# Altium PCB PCB1.PcbDoc
Units mil, origin at the board's own origin, x right, y up, seen from the top; angles counter-clockwise.
Board outline 2585 x 4010 mil, 2 copper layers (Top Layer, Bottom Layer); 69 components, 50 nets, 301 pads, 131 vias.
Unrouted connection lines stored in the file: 15.
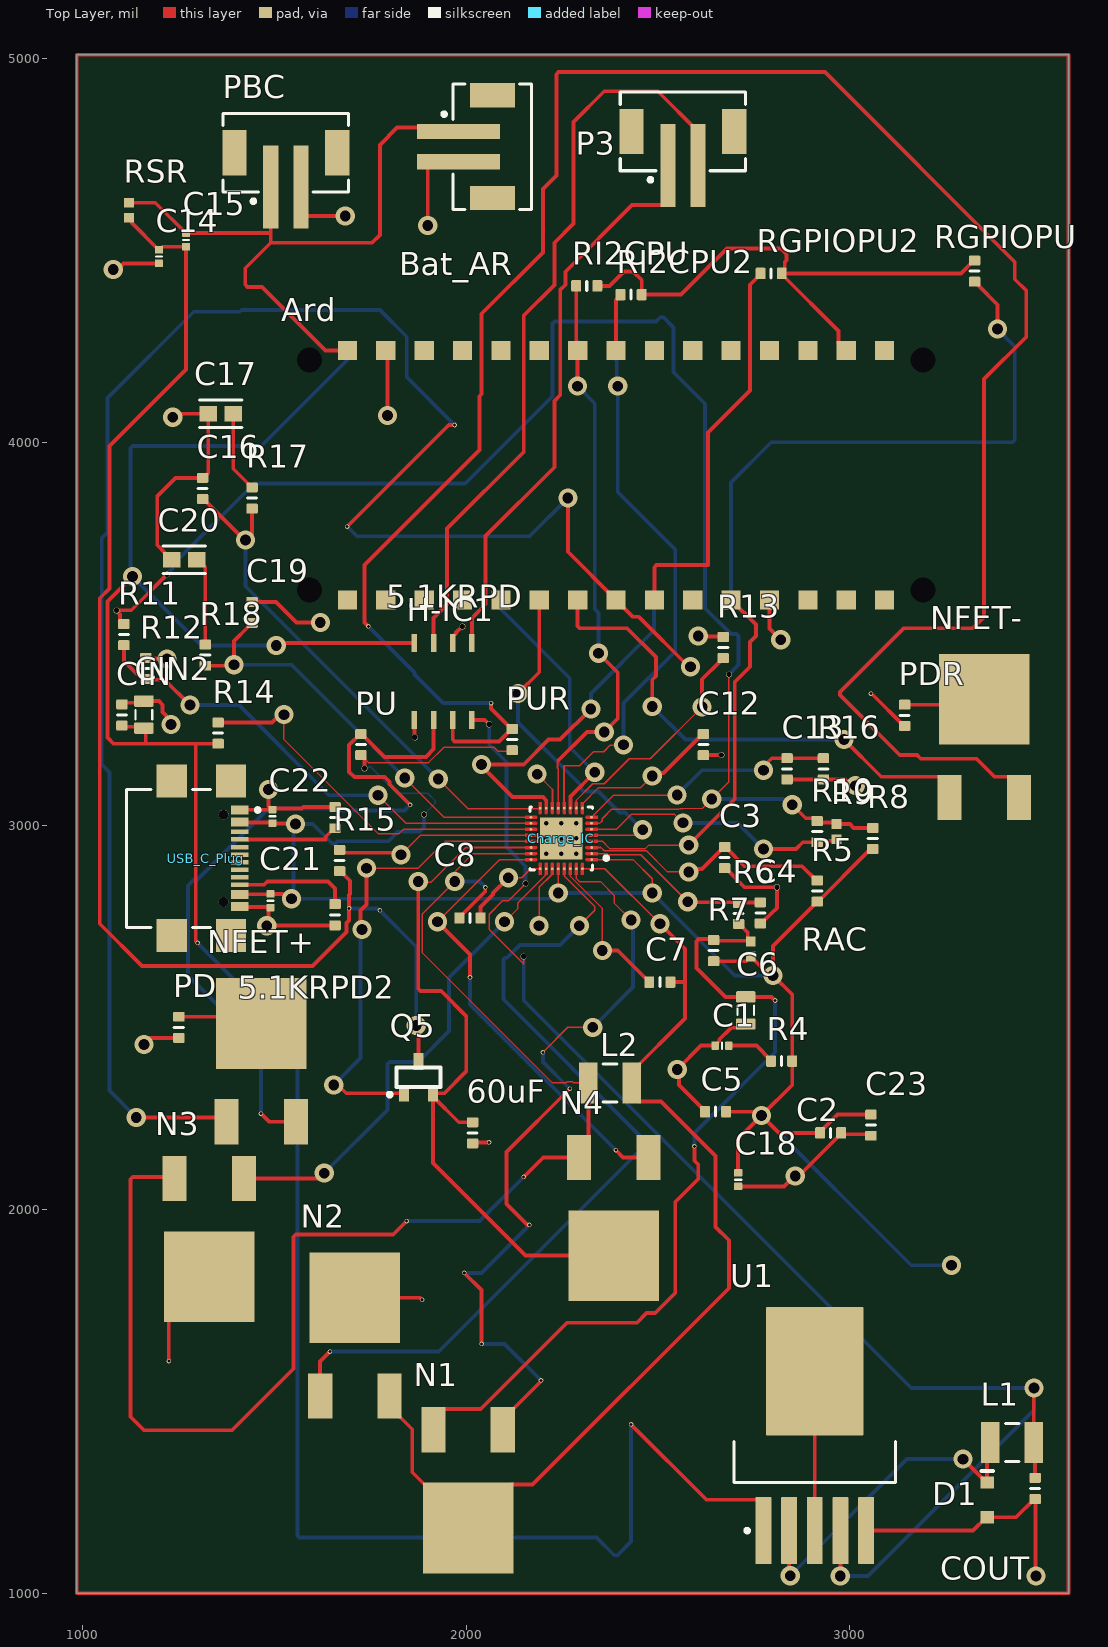
[diagram p0: Top Layer view]
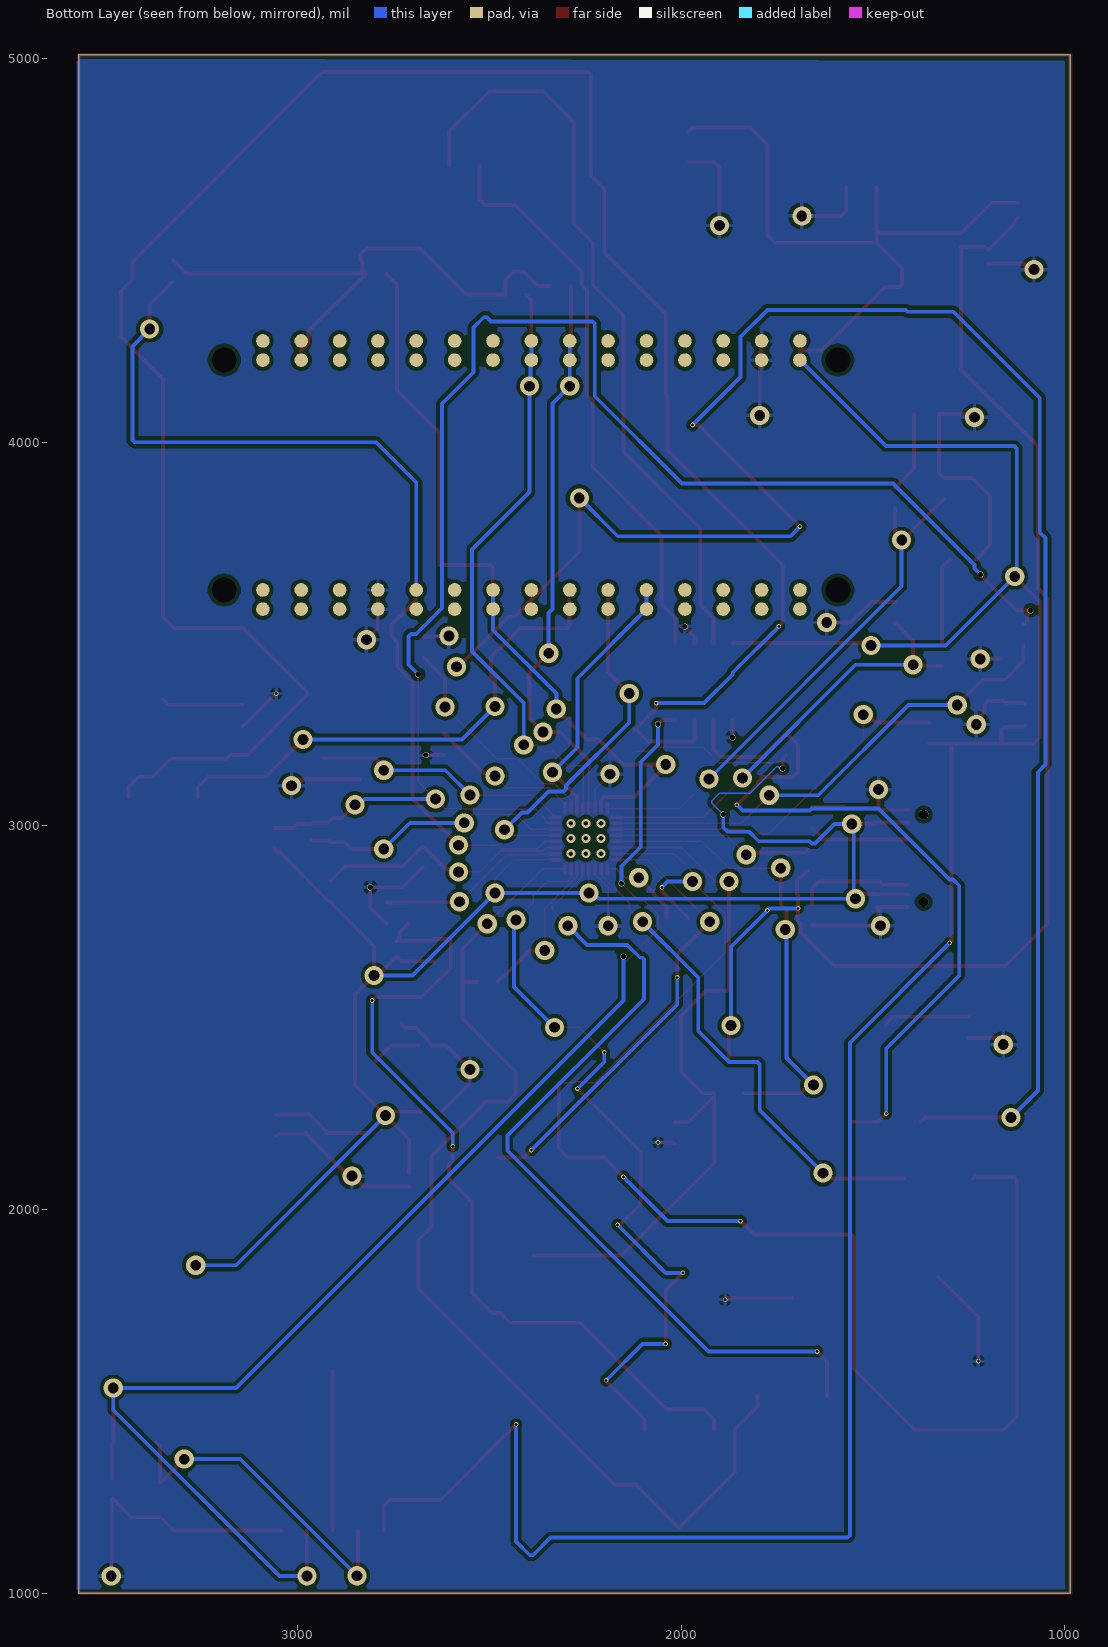
[diagram p1: Bottom Layer view, seen from below]
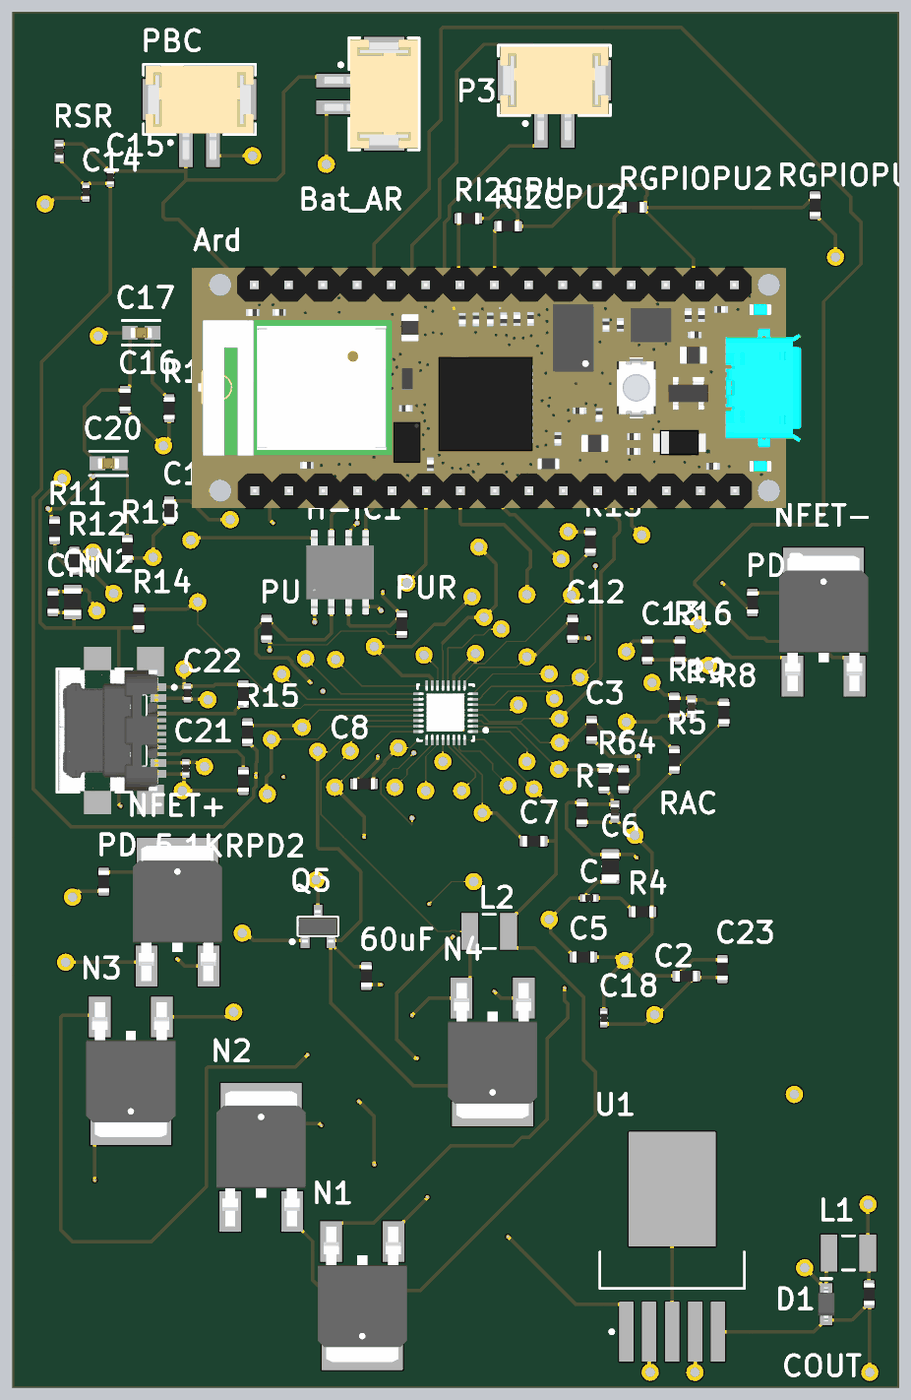
[diagram p2: 3D render of the assembled board from above, using the file's embedded part models]

## Layer stack, top to bottom
Top Solder: solder mask 0.4, Solder Resist, Dk 3.5
Top Layer: signal copper 1.4
Dielectric 1: dielectric 12.6, FR-4, Dk 4.8
Bottom Layer: signal copper 1.4
Bottom Solder: solder mask 0.4, Solder Resist, Dk 3.5

## Board outline
985,1000 985,5010 3570,5010 3570,1000

## Design rules (kind name [scope] priority, off if disabled: settings)
Clearance [All] p1: gap=10 ignorepadtopadclearanceinfootprint=FALSE
PolygonConnect [All] p1: connectstyle=Relief reliefconductorwidth=10 reliefentries=4 polygonreliefangle="90 Angle" airgapwidth=10
RoutingVias [All] p1: holewidth=28 width=50 viastyle="Through Hole" minholewidth=28 minwidth=50 maxholewidth=28 maxwidth=50
SolderMaskExpansion [All] p1: expansion=4 istentingtop=FALSE
SupplyNets "Schematic Supply Nets_1" [InNet('BAT-')] p1: voltage=0.000
SupplyNets "Schematic Supply Nets_3" [InNet('REGN')] p2: voltage=0.000
Width [All] p1: maxlimit=10 minlimit=10 preferedwidth=10
30 further rules are at their usual default settings.

## Components (designator, comment, footprint, x,y, rotation, side; value= is the part's Value field where it differs from the comment)
5.1KRPD "5K1 0.1 0603" RESC0603(1608)_L 1658.23,3021.47 r90 top value=5.1k
5.1KRPD2 "5K1 0.1 0603" RESC0603(1608)_L 1658.23,2768.43 r270 top value=5.1k
60uF "0603-CAP" RESC0603(1608)_L 2016.71,2200 r90 top value=60uF
Ard "ARDUNIO_33_NANO_IOT" Arduino33NanoIOT 3240.59,4264.07 r180 top
Bat_AR "2-Pin" 620302124022 2068.38,4770.5 r90 top
C1 "Capacitor 1u" RESC0402(1005)_L 2666.68,2427.29 r0 top value=1µF
C2 "0603-CAP" RESC0603(1608)_L 2950,2200 r180 top value=40uF
C3 "Capacitor 33n" RESC0603(1608)_L 2673.63,2917.54 r90 top value=33nF
C4 "Capacitor 33n" RESC0603(1608)_L 2766.75,2773.41 r90 top value=33nF
C5 "Capacitor 470n" RESC0603(1608)_L 2650.01,2255.14 r0 top value=470nF
C6 "Capacitor 10u" RESC0805(2012)_L 2728.78,2519.14 r90 top value=10µF
C7 "Capacitor 47n" RESC0603(1608)_L 2504.74,2593.01 r0 top value=47nF
C8 "Capacitor 47n" RESC0603(1608)_L 2010,2760 r180 top value=47nF
C12 "Capacitor 100p" RESC0603(1608)_L 2618.28,3211.89 r90 top value=100pF
C13 "Capacitor 100p" RESC0603(1608)_L 2836.31,3148.88 r90 top value=100pF
C14 "Capacitor 1u" RESC0402(1005)_L 1199.24,4484 r90 top value=1µF
C15 "Capacitor 1u" RESC0402(1005)_L 1270,4527.28 r90 top value=1µF
C16 "Capacitor 33p" RESC0603(1608)_L 1313.07,3879.54 r270 top value=33pF
C17 "1800pf" FP-GRM188-0_1-e0_2_0_5-IPC_A 1360.39,4074.32 r0 top
C18 "Capacitor 1u" RESC0402(1005)_L 2708.91,2078.06 r90 top value=1µF
C19 "Capacitor 33p" RESC0603(1608)_L 1441.89,3556.5 r270 top value=33pF
C20 "1800pf" FP-GRM188-0_1-e0_2_0_5-IPC_A 1265.12,3693.86 r0 top
C21 "Capacitor 1u" RESC0402(1005)_L 1490,2805 r90 top value=1µF
C22 "Capacitor 1u" RESC0402(1005)_L 1495,3025 r270 top value=1µF
C23 "Capacitor 3u3" RESC0603(1608)_L 3055,2220 r90 top value=3.3µF
Charge_IC "BQ25703ARSNT" FP-RSN0032B-MFG 2247.96,2967.34 r180 top
CIN "0603-CAP" RESC0603(1608)_L 1102.83,3289.23 r270 top value=470u
CIN2 "Capacitor 10u" RESC0805(2012)_L 1160,3290 r270 top value=10µF
COUT "0603-CAP" RESC0603(1608)_L 3482.91,1273.07 r90 top value=470u
D1 "DIODE_SCHOTTKY_SOD-323" SOD-323 3357.91,1243.35 r270 top
H-IC1 "DriveMotorControl" TB67H451FNG,EL 1865.11,3276.5 r0 top
L1 "22uH" INDC3225X24N 3422.91,1393.07 r0 top
L2 "IND_1210" INDC3225X24N 2375,2330 r180 top value=2.2uH
N1 "Q1" DPAK(2-7K1S) 2005,1288.11 r180 top
N2 "Q2" DPAK(2-7K1S) 1710,1651.89 r0 top
N3 "Q3" DPAK(2-7K1S) 1330,1943.11 r180 top
N4 "Q4" DPAK(2-7K1S) 2385,1998.11 r180 top
NFET+ "M2" DPAK(2-7K1S) 1465.88,2366.94 r0 top
NFET- "M1" DPAK(2-7K1S) 3350,3211.89 r0 top
P3 "620302124022" 620302124022 2565,4810 r180 top
PBC "620302124022" 620302124022 1530.03,4754.32 r180 top
PD "10K 0.1 0603" RESC0603(1608)_L 1250.88,2475.05 r90 top value=10k
PDR "10K 0.1 0603" RESC0603(1608)_L 3143.01,3288.29 r90 top value=10k
PU "10K 0.1 0603" RESC0603(1608)_L 1725.76,3211.89 r270 top value=10k
PUR "10K 0.1 0603" RESC0603(1608)_L 2120,3225 r270 top value=10k
Q5 "DMP3056L-7" SOT96P240X110-3N/SOT23-3 1875.75,2344.69 r90 top
R4 "2R2 5 0603" RESC0603(1608)_L 2822.18,2387.07 r0 top value=2.2
R5 "5R1 5 0603" RESC0603(1608)_L 2915,2830 r270 top value=5.1
R6 "5R1 5 0603" RESC0603(1608)_L 2709.84,2772.02 r270 top value=5.1
R7 "1K 0.1 0603" RESC0603(1608)_L 2645,2675 r270 top value=1k
R8 "10R 0.1 0603" RESC0603(1608)_L 3059.82,2967.34 r90 top value=10
R9 "Resistor 0R +/- 5% 0402 100 mW" RESC1005X40X25ML05T05 2965,2985 r90 top value=0
R10 "1R 5 0603" RESC0603(1608)_L 2915,2985 r270 top value=1
R11 "300K 0.1 0603" RESC0603(1608)_L 1107.8,3498.56 r90 top value=300k
R12 "200K 0.1 0603" RESC0603(1608)_L 1165,3410 r270 top value=200k
R13 "30K 0.1 0603" RESC0603(1608)_L 2670,3465 r270 top value=30k
R14 "10R 0.1 0603" RESC0603(1608)_L 1353.4,3241.77 r90 top value=10
R15 "10R 0.1 0603" RESC0603(1608)_L 1670,2910 r90 top value=10
R16 "130K 0.1 0603" RESC0603(1608)_L 2931.31,3148.88 r90 top value=130k
R17 "2R2 5 0603" RESC0603(1608)_L 1441.89,3854.49 r90 top value=2.2
R18 "2R2 5 0603" RESC0603(1608)_L 1320,3445 r90 top value=2.2
RAC "Resistor 0R +/- 5% 0402 100 mW" RESC1005X40X25ML05T05 2741.58,2679.45 r90 top value=0
RGPIOPU "10K 0.1 0603" RESC0603(1608)_L 3325.04,4446.01 r270 top value=10k
RGPIOPU2 "10K 0.1 0603" RESC0603(1608)_L 2795,4440 r180 top value=10k
RI2CPU "10K 0.1 0603" RESC0603(1608)_L 2314.3,4407.59 r180 top value=10k
RI2CPU2 "10K 0.1 0603" RESC0603(1608)_L 2430,4385 r180 top value=10k
RSR "Resistor 0R +/- 5% 0402 100 mW" RESC1005X40X25ML05T05 1121.03,4604.67 r90 top value=0
U1 "LM2596S-5.0/NOPB" KTT0005B_M 2908.65,1411.31 r90 top
USB_C_Plug "USB4110-GF-A" FP-USB4110-GF-A-MFG 1265.12,2915.47 r270 top

## Footprints (in the part's own frame and the unit in brackets; to place one, negate y for a bottom-side part, rotate by r counter-clockwise, add the part's x,y. Pads: shape width x height; smd on the part's side, far side on the other; paste and mask are expansions set on the pad)
620302124022 [mm] "2.00mm SMT Male Vertical Shrouded Header, 2p"
  rect 1x5.5 smd: 1(1,2.25) 2(-1,2.25)
  rect 1.6x3 smd: MP1(-3.4,0) MP2(3.4,0)
  silkscreen extent -4.15,-2.6 4.15,3.32, body extent -4,-2.5 4,4.51, height 6.77
Arduino33NanoIOT [mm]
  rect 1.27x1.27 smd: 1(3.81,0.635) 2(6.35,0.635) 3(8.89,0.635) 4(11.43,0.635) 5(13.97,0.635) 6(16.51,0.635) 7(19.05,0.635) 8(21.59,0.635) 9(24.13,0.635) 10(26.67,0.635) 11(29.21,0.635) 12(31.75,0.635) 13(34.29,0.635) 14(36.83,0.635) 15(39.37,0.635) 16(3.81,17.145) 17(6.35,17.145) 18(8.89,17.145) 19(11.43,17.145) 20(13.97,17.145) 21(16.51,17.145) 22(19.05,17.145) 23(21.59,17.145) 24(24.13,17.145) 25(26.67,17.145) 26(29.21,17.145) 27(31.75,17.145) 28(34.29,17.145) 29(36.83,17.145) 30(39.37,17.145)
  round 0.9 smd far side: 1(3.825,0) 1(3.825,1.27) 2(6.365,0) 2(6.365,1.27) 3(8.905,0) 3(8.905,1.27) 4(11.445,0) 4(11.445,1.27) 5(13.985,0) 5(13.985,1.27) 6(16.525,0) 6(16.525,1.27) 7(19.065,0) 7(19.065,1.27) 8(21.605,0) 8(21.605,1.27) 9(24.145,0) 9(24.145,1.27) 10(26.685,0) 10(26.685,1.27) 11(29.225,0) 11(29.225,1.27) 12(31.765,0) 12(31.765,1.27) 13(34.305,0) 13(34.305,1.27) 14(36.845,0) 14(36.845,1.27) 15(39.385,0) 15(39.385,1.27) 16(3.825,16.486) 16(3.825,17.756) 17(6.365,16.486) 17(6.365,17.756) 18(8.905,17.756) 18(8.905,16.486) 19(11.445,17.756) 19(11.445,16.486) 20(13.985,16.486) 20(13.985,17.756) 21(16.525,16.486) 21(16.525,17.756) 22(19.065,16.486) 22(19.065,17.756) 23(21.605,16.486) 23(21.605,17.756) 24(24.145,16.486) 24(24.145,17.756) 25(26.685,16.486) 25(26.685,17.756) 26(29.225,16.486) 26(29.225,17.756) 27(31.765,16.486) 27(31.765,17.756) 28(34.305,16.486) 28(34.305,17.756) 29(36.845,16.486) 29(36.845,17.756) 30(39.385,16.486) 30(39.385,17.756)
  round 0 hole 1.65: 12(1.27,16.5) 12(1.27,1.27) 12(41.89,1.27) 12(41.89,16.5)
  body extent -1.13,0 44,17.78, height 9.36
DPAK(2-7K1S) [mm]
  rect 1.6x3 smd: 1(-2.3,-3.5) 3(2.3,-3.5)
  rect 6x6 smd: 2(0,3)
  body extent -3.3,-4.6 3.3,5.4, height 2.27
FP-GRM188-0_1-e0_2_0_5-IPC_A [mil]
  rect 45.62x39.85 smd paste+0 mask+0: 1(-32.55,0) 2(32.55,0)
  silkscreen extent -55,-36 55,36, body extent -75,-40 75,40, height 10
FP-RSN0032B-MFG [mm]
  round 0.18 smd paste+0 mask+0: 1(-2.01,1.4) 2(-2.01,1) 3(-2.01,0.6) 4(-2.01,0.2) 5(-2,-0.2) 6(-2,-0.6) 7(-2,-1) 8(-2,-1.4) 9(-1.4,-2.01) 10(-1,-2.01) 11(-0.6,-2.01) 12(-0.2,-2.01) 13(0.2,-2) 14(0.6,-2) 15(1,-2) 16(1.4,-2) 17(2.01,-1.4) 18(2.01,-1) 19(2.01,-0.6) 20(2.01,-0.2) 21(2,0.2) 22(2,0.6) 23(2,1) 24(2,1.4) 25(1.4,2.01) 26(1,2.01) 27(0.6,2.01) 28(0.2,2.01) 29(-0.2,2) 30(-0.6,2) 31(-1,2) 32(-1.4,2)
  rect 2.8x2.8 smd paste-1000 mask+0: 33(0,0)
  Top Layer region: -2.4,1.5 -1.7,1.5 -1.662,1.492 -1.629,1.471 -1.608,1.438 -1.6,1.4 -1.6,1.4 -1.608,1.362 -1.629,1.329 -1.662,1.308 -1.7,1.3 -1.7,1.3 -2.4,1.3
  Top Layer region: -2.4,1.1 -1.7,1.1 -1.662,1.092 -1.629,1.071 -1.608,1.038 -1.6,1 -1.6,1 -1.608,0.962 -1.629,0.929 -1.662,0.908 -1.7,0.9 -1.7,0.9 -2.4,0.9
  Top Layer region: -2.4,0.7 -1.7,0.7 -1.662,0.692 -1.629,0.671 -1.608,0.638 -1.6,0.6 -1.6,0.6 -1.608,0.562 -1.629,0.529 -1.662,0.508 -1.7,0.5 -1.7,0.5 -2.4,0.5
  Top Layer region: -2.4,0.3 -1.7,0.3 -1.662,0.292 -1.629,0.271 -1.608,0.238 -1.6,0.2 -1.6,0.2 -1.608,0.162 -1.629,0.129 -1.662,0.108 -1.7,0.1 -1.7,0.1 -2.4,0.1
  Top Layer region: -2.4,-0.1 -1.7,-0.1 -1.662,-0.108 -1.629,-0.129 -1.608,-0.162 -1.6,-0.2 -1.6,-0.2 -1.608,-0.238 -1.629,-0.271 -1.662,-0.292 -1.7,-0.3 -1.7,-0.3 -2.4,-0.3
  Top Layer region: -2.4,-0.5 -1.7,-0.5 -1.662,-0.508 -1.629,-0.529 -1.608,-0.562 -1.6,-0.6 -1.6,-0.6 -1.608,-0.638 -1.629,-0.671 -1.662,-0.692 -1.7,-0.7 -1.7,-0.7 -2.4,-0.7
  Top Layer region: -2.4,-0.9 -1.7,-0.9 -1.662,-0.908 -1.629,-0.929 -1.608,-0.962 -1.6,-1 -1.6,-1 -1.608,-1.038 -1.629,-1.071 -1.662,-1.092 -1.7,-1.1 -1.7,-1.1 -2.4,-1.1
  Top Layer region: -2.4,-1.3 -1.7,-1.3 -1.662,-1.308 -1.629,-1.329 -1.608,-1.362 -1.6,-1.4 -1.6,-1.4 -1.613,-1.45 -1.65,-1.487 -1.7,-1.5 -1.7,-1.5 -2.4,-1.5
  Top Layer region: 2.4,-1.5 1.7,-1.5 1.662,-1.492 1.629,-1.471 1.608,-1.438 1.6,-1.4 1.6,-1.4 1.608,-1.362 1.629,-1.329 1.662,-1.308 1.7,-1.3 1.7,-1.3 2.4,-1.3
  Top Layer region: 2.4,-1.1 1.7,-1.1 1.662,-1.092 1.629,-1.071 1.608,-1.038 1.6,-1 1.6,-1 1.608,-0.962 1.629,-0.929 1.662,-0.908 1.7,-0.9 1.7,-0.9 2.4,-0.9
  Top Layer region: 2.4,-0.7 1.7,-0.7 1.662,-0.692 1.629,-0.671 1.608,-0.638 1.6,-0.6 1.6,-0.6 1.608,-0.562 1.629,-0.529 1.662,-0.508 1.7,-0.5 1.7,-0.5 2.4,-0.5
  Top Layer region: 2.4,-0.3 1.7,-0.3 1.662,-0.292 1.629,-0.271 1.608,-0.238 1.6,-0.2 1.6,-0.2 1.608,-0.162 1.629,-0.129 1.662,-0.108 1.7,-0.1 1.7,-0.1 2.4,-0.1
  Top Layer region: 2.4,0.1 1.7,0.1 1.662,0.108 1.629,0.129 1.608,0.162 1.6,0.2 1.6,0.2 1.608,0.238 1.629,0.271 1.662,0.292 1.7,0.3 1.7,0.3 2.4,0.3
  Top Layer region: 2.4,0.5 1.7,0.5 1.662,0.508 1.629,0.529 1.608,0.562 1.6,0.6 1.6,0.6 1.608,0.638 1.629,0.671 1.662,0.692 1.7,0.7 1.7,0.7 2.4,0.7
  Top Layer region: 2.4,0.9 1.7,0.9 1.662,0.908 1.629,0.929 1.608,0.962 1.6,1 1.6,1 1.608,1.038 1.629,1.071 1.662,1.092 1.7,1.1 1.7,1.1 2.4,1.1
  Top Layer region: 2.4,1.3 1.7,1.3 1.662,1.308 1.629,1.329 1.608,1.362 1.6,1.4 1.6,1.4 1.608,1.438 1.629,1.471 1.662,1.492 1.7,1.5 1.7,1.5 2.4,1.5
  Top Layer region: -1.5,-2.4 -1.5,-1.7 -1.492,-1.662 -1.471,-1.629 -1.438,-1.608 -1.4,-1.6 -1.4,-1.6 -1.362,-1.608 -1.329,-1.629 -1.308,-1.662 -1.3,-1.7 -1.3,-1.7 -1.3,-2.4
  Top Layer region: -1.1,-2.4 -1.1,-1.7 -1.092,-1.662 -1.071,-1.629 -1.038,-1.608 -1,-1.6 -1,-1.6 -0.962,-1.608 -0.929,-1.629 -0.908,-1.662 -0.9,-1.7 -0.9,-1.7 -0.9,-2.4
  Top Layer region: -0.7,-2.4 -0.7,-1.7 -0.692,-1.662 -0.671,-1.629 -0.638,-1.608 -0.6,-1.6 -0.6,-1.6 -0.562,-1.608 -0.529,-1.629 -0.508,-1.662 -0.5,-1.7 -0.5,-1.7 -0.5,-2.4
  Top Layer region: -0.3,-2.4 -0.3,-1.7 -0.292,-1.662 -0.271,-1.629 -0.238,-1.608 -0.2,-1.6 -0.2,-1.6 -0.162,-1.608 -0.129,-1.629 -0.108,-1.662 -0.1,-1.7 -0.1,-1.7 -0.1,-2.4
  Top Layer region: 0.1,-2.4 0.1,-1.7 0.108,-1.662 0.129,-1.629 0.162,-1.608 0.2,-1.6 0.2,-1.6 0.238,-1.608 0.271,-1.629 0.292,-1.662 0.3,-1.7 0.3,-1.7 0.3,-2.4
  Top Layer region: 0.5,-2.4 0.5,-1.7 0.508,-1.662 0.529,-1.629 0.562,-1.608 0.6,-1.6 0.6,-1.6 0.638,-1.608 0.671,-1.629 0.692,-1.662 0.7,-1.7 0.7,-1.7 0.7,-2.4
  Top Layer region: 0.9,-2.4 0.9,-1.7 0.908,-1.662 0.929,-1.629 0.962,-1.608 1,-1.6 1,-1.6 1.038,-1.608 1.071,-1.629 1.092,-1.662 1.1,-1.7 1.1,-1.7 1.1,-2.4
  Top Layer region: 1.3,-2.4 1.3,-1.7 1.308,-1.662 1.329,-1.629 1.362,-1.608 1.4,-1.6 1.4,-1.6 1.438,-1.608 1.471,-1.629 1.492,-1.662 1.5,-1.7 1.5,-1.7 1.5,-2.4
  Top Layer region: 1.5,2.4 1.5,1.7 1.492,1.662 1.471,1.629 1.438,1.608 1.4,1.6 1.4,1.6 1.362,1.608 1.329,1.629 1.308,1.662 1.3,1.7 1.3,1.7 1.3,2.4
  Top Layer region: 1.1,2.4 1.1,1.7 1.092,1.662 1.071,1.629 1.038,1.608 1,1.6 1,1.6 0.962,1.608 0.929,1.629 0.908,1.662 0.9,1.7 0.9,1.7 0.9,2.4
  Top Layer region: 0.7,2.4 0.7,1.7 0.687,1.65 0.65,1.613 0.6,1.6 0.6,1.6 0.562,1.608 0.529,1.629 0.508,1.662 0.5,1.7 0.5,1.7 0.5,2.4
  Top Layer region: 0.3,2.4 0.3,1.7 0.292,1.662 0.271,1.629 0.238,1.608 0.2,1.6 0.2,1.6 0.162,1.608 0.129,1.629 0.108,1.662 0.1,1.7 0.1,1.7 0.1,2.4
  Top Layer region: -0.1,2.4 -0.1,1.7 -0.108,1.662 -0.129,1.629 -0.162,1.608 -0.2,1.6 -0.2,1.6 -0.238,1.608 -0.271,1.629 -0.292,1.662 -0.3,1.7 -0.3,1.7 -0.3,2.4
  Top Layer region: -0.5,2.4 -0.5,1.7 -0.508,1.662 -0.529,1.629 -0.562,1.608 -0.6,1.6 -0.6,1.6 -0.638,1.608 -0.671,1.629 -0.692,1.662 -0.7,1.7 -0.7,1.7 -0.7,2.4
  Top Layer region: -0.9,2.4 -0.9,1.7 -0.908,1.662 -0.929,1.629 -0.962,1.608 -1,1.6 -1,1.6 -1.038,1.608 -1.071,1.629 -1.092,1.662 -1.1,1.7 -1.1,1.7 -1.1,2.4
  Top Layer region: -1.3,2.4 -1.3,1.7 -1.313,1.65 -1.35,1.613 -1.4,1.6 -1.4,1.6 -1.438,1.608 -1.471,1.629 -1.492,1.662 -1.5,1.7 -1.5,1.7 -1.5,2.4
  silkscreen extent -3.1,-2.07 2.07,2.07, body extent -2.5,-2.5 2.5,2.5, height 0.25
FP-USB4110-GF-A-MFG [mm]
  rect 2.18x2 smd paste+0 mask+0: 1(-5.11,3.105) 2(5.11,3.105) 3(-5.11,-0.825) 4(5.11,-0.825)
  rect 0.6x1.15 smd paste+0 mask+0: A1-B12(-3.2,3.68) A4-B9(-2.4,3.68) B1-A12(3.2,3.68) B4-A9(2.4,3.68)
  rect 0.3x1.15 smd paste+0 mask+0: A5(-1.25,3.68) A6(-0.25,3.68) A7(0.25,3.68) A8(1.25,3.68) B5(1.75,3.68) B6(0.75,3.68) B7(-0.75,3.68) B8(-1.75,3.68)
  round 0.65 hole 0.65 unplated paste-2539.97 mask+0: ""(-2.89,2.605) ""(2.89,2.605)
  silkscreen extent -4.57,-3.83 4.57,4.99, body extent -6.3,-3.92 6.3,4.36, height 0.25
INDC3225X24N [mm] "Chip Inductor, 2-Leads, Body 3.20x2.50mm, IPC Medium Density"
  rect 1.23x2.72 smd: 1(-1.435,0) 2(1.435,0)
  silkscreen extent -0.45,-1.26 0.45,1.26, body extent -1.7,-1.35 1.7,1.35, height 2.4
KTT0005B_M [mm] "DPAK, 5-Leads, Body 10.65x9.65mm, Pitch 1.7mm, IPC Low Density"
  rrect10% 4.45x1.05 smd: 1(-6.3,3.4) 2(-6.3,1.7) 3(-6.3,0) 4(-6.3,-1.7) 5(-6.3,-3.4)
  rrect2% 8.5x6.45 smd: 6(4.25,0)
  silkscreen extent -6.42,-5.35 -0.4,5.35, body extent -3.1,-5.32 6.55,5.33, height 4.83
RESC0402(1005)_L [mm] "Chip Resistor, Body 1.0x0.5mm, IPC High Density"
  rrect25% 0.5x0.55 smd: 1(-0.45,0) 2(0.45,0)
  silkscreen extent 0,-0.2 0,0.2, body extent -0.5,-0.25 0.5,0.25, height 0.3
RESC0603(1608)_L [mm] "Chip Resistor, Body 1.6x0.8mm, IPC High Density"
  rrect25% 0.66x0.76 smd: 1(-0.7,0) 2(0.7,0)
  silkscreen extent 0,-0.3 0,0.3, body extent -0.8,-0.4 0.8,0.4, height 0.45
RESC0805(2012)_L [mm] "Chip Resistor, Body 2.0x1.3mm, IPC High Density"
  rrect25% 0.76x1.3 smd: 1(-0.9,0) 2(0.89,0)
  silkscreen extent -0.3,-0.55 0.3,0.55, body extent -1,-0.62 1,0.63, height 0.6
RESC1005X40X25ML05T05 [mm] "Chip Resistor, 2-Leads, Body 1.05x0.55mm, IPC Low Density"
  rect 0.65x0.65 smd: 1(-0.5,0) 2(0.5,0)
  body extent -0.53,-0.28 0.53,0.28, height 0.4
SOD-323 [mil]
  rect 31.5x35.43 smd: 1(-45.28,0) 2(45.28,0)
  silkscreen extent -75,-15 -75,15, body extent -49,-25 49,25, height 43
SOT96P240X110-3N/SOT23-3 [mm]
  rect 1.1x0.65 smd: 1(-1.05,0.96) 2(-1.05,-0.96) 3(1.05,0)
  silkscreen extent -1.27,-1.45 0.65,2.03, body extent -1.2,-1.45 1.2,1.45, height 1.1
TB67H451FNG,EL [mm]
  rect 0.36x1.195 smd: 1(0,0) 2(1.27,0) 3(2.54,0) 4(3.81,0) 5(3.81,5.08) 6(2.54,5.08) 7(1.27,5.08) 8(0,5.08)
  round 0.3 on Top Overlay: ""(-0.254,1.143)
  body extent -0.6,-0.56 4.41,5.64, height 1.7

## Part data
5.1KRPD 5.1KRPD2: library part CMP-009-01454-3, "0603 (1608 Metric) 1/10 W 5K1 1 Precision Thick Film Chip Resistor", Case-EIA=0603, Power=100mW, Tolerance=0.1%
60uF C2 CIN COUT: library part CMP-001-00083-4, "Imperial 0603 Capacitor", Case/Package=0603
Ard: "Arduino Nano IC for I2C Comms/Control"
Bat_AR P3 PBC: library part CMP-1502-00660-2, Color="Beige, White", Contact Resistance=20mΩ, Current Rating=2A, Flammability Rating="UL94 V-0", Insulation Resistance=1GΩ, Max Operating Temperature=85°C, Min Operating Temperature=-40°C, Operating Supply Voltage=100V, Voltage Rating=125V, Connector Type="Male Pin", Contact Gender=Male, Contact Material=Copper, Contact Mating Length=3.5052mm, Contact Plating=Tin, Gender=Male, Height=6.6mm, Housing Material=Nylon, Insulation=Insulated, Lead Pitch=2mm, Length=5mm, Mount="Surface Mount", NexarPartId=18818242, Number of Contacts=2, Number of Pins=2, Number of Positions=2, Number of Rows=1, Orientation=Vertical, Packaging="Tape and Reel", Pitch=2mm, REACH SVHC=Unknown, RoHS=Compliant, Termination=SMD/SMT, Width=7.9mm
C1 C14 C15 C18 C21 C22: library part CMP-001-00736-2, "Chip Capacitor, 1u 25V 0402 X7R", Capacitor Type=X7R, Case/Package=0402, Voltage Rating=25V
C3 C4: library part CMP-001-00783-2, "Chip Capacitor, 33n 10V 0603 X7R", Capacitor Type=X7R, Case/Package=0603, Voltage Rating=10V
C5: library part CMP-001-00951-2, "Chip Capacitor, 470n 50V 0603 X7R", Capacitor Type=X7R, Case/Package=0603, Voltage Rating=50V
C6: library part CMP-001-00968-2, "Chip Capacitor, 10u 25V 0805 X7R", Capacitor Type=X7R, Case/Package=0805, Voltage Rating=25V
C7 C8: library part CMP-001-00939-2, "Chip Capacitor, 47n 50V 0603 X7R", Capacitor Type=X7R, Case/Package=0603, Voltage Rating=50V
C12 C13: library part CMP-001-00907-2, "Chip Capacitor, 100p 50V 0603 X7R", Capacitor Type=X7R, Case/Package=0603, Voltage Rating=50V
C16 C19: library part CMP-001-00901-2, "Chip Capacitor, 33p 50V 0603 X7R", Capacitor Type=X7R, Case/Package=0603, Voltage Rating=50V
C17 C20: library part CMP-2006-02619-2, "Chip Multilayer Ceramic Capacitors for General Purpose, 0603, 1800pF, C0G, 30ppm/°C, 5%, 50V", Capacitance=1.8nF, Case Code (Imperial)=0603, Case Code (Metric)=1608, Dielectric=C0G, Max Operating Temperature=125°C, Min Operating Temperature=-55°C, Package Quantity=1, Temperature Coefficient=30ppm/°C, Tolerance=5%, Voltage=50V, Case/Package=0603, Depth=0.8mm, Height=0.8mm, Lead Free="Lead Free", Length=1.6mm, Mount="Surface Mount", Packaging="Tape and Reel", Radiation Hardening=No, REACH SVHC="No SVHC", Termination=SMD/SMT, Thickness=0.035inch, Voltage Rating=50V, Voltage Rating (DC)=50V, Width=0.031inch
C23: library part CMP-001-00961-2, "Chip Capacitor, 3u3 50V 0603 X7R", Capacitor Type=X7R, Case/Package=0603, Voltage Rating=50V
Charge_IC: library part CMP-04911-000011-1, "IC BATT MON MULTI-CHEM 32WQFN", Ambient Temperature Range High=+85°C, Ambient Temperature Range Low=-40°C, Manufacturer="Texas Instruments", Max Junction Temp=+125°C, Max Supply Voltage=24V, Min Supply Voltage=3.5V, Output Current=6.35A, Output Voltage=19.2V, Package=RSN0032B, Temperature="-40°C to +125°C", Automotive=No, Category=IC, ComponentLink2Description=Datasheet, ComponentLink2URL=http://www.ti.com/lit/ds/symlink/bq25703a.pdf, Device Class L1="Integrated Circuits (ICs)", Device Class L2="Power Management ICs", Device Class L3="Battery Management", Digikey Description="IC BATT MON MULTI-CHEM 32WQFN", Height=0.8mm, Lead Free=Yes, Manufacturer Part Number=BQ25703ARSNT, Mouser Description="NVDC I2C Battery Buck-Boost Charge Controller with System Power Monitor & Processor 32-QFN -40 to 85", Number Of Cells=4, Octopart=https://octopart.com/bq25703arsnt-texas+instruments-81848930, RoHS=TRUE, Standoff Height=0mm, Temperature Range High=+125°C, Temperature Range Low=-40°C
CIN2: library part CMP-001-00971-2, "Chip Capacitor, 10u 50V 0805 X7R", Capacitor Type=X7R, Case/Package=0805, Voltage Rating=50V
D1: library part CMP-004-00034-2, "Schottky Diode with SOD-323 Footprint"
H-IC1: "H-Bridge IC"
L1 L2: library part CMP-006-00021-1, "1210 Inductor", Case/Package=1210
N1 N2 N3 N4 NFET+ NFET-: library part CMP-013-00035-2, "N Channel MOSFET, DPAK(2-7K1S) Footprint", Transistor Type="N Channel MOSFET"
PD PDR PU PUR RGPIOPU RGPIOPU2 RI2CPU RI2CPU2: library part CMP-009-01057-2, "0603 (1608 Metric) 1/10 W 10K 1 Precision Thick Film Chip Resistor", Case-EIA=0603, Power=100mW, Tolerance=0.1%
Q5: library part CMP-047-000001-2, "P-MOSFET Enhancement Mode", Manufacturer="Diodes Incorporated", Package=SOT-23, ComponentLink1Description=Datasheet, ComponentLink1URL=https://www.mouser.com/datasheet/2/115/DIOD_S_A0012915142_1-2543925.pdf, Design Item ID=DMP3056L-7, DeviceName=SOT-23, DeviceSetName=TRANSISTOR_P_MOS_?_*, DKPN=DMP3056L-7DITR-ND, GateName_1=G$1, LibraryName=HyTechDevices, MOPN=621-DMP3056L-7, MPN=DMP3056L-7, Source=LOGICFETS.SchLib, SymbolName_1=MOSFET_P-CHANNEL
R4 R17 R18: library part CMP-0103-0519-5, "0603 (1608 Metric) 1/10 W 2R2 5 Thick Film Chip Resistor", Case-EIA=0603, Case-Metric=1608, Power=100mW, Temp. Coefficent=±500, Tolerance=5%, Technology=SMT
R5 R6: library part CMP-0103-0528-5, "0603 (1608 Metric) 1/10 W 5R1 5 Thick Film Chip Resistor", Case-EIA=0603, Case-Metric=1608, Power=100mW, Temp. Coefficent=±500, Tolerance=5%, Technology=SMT
R7: library part CMP-009-01111-3, "0603 (1608 Metric) 1/10 W 1K 1 Precision Thick Film Chip Resistor", Case-EIA=0603, Power=100mW, Tolerance=0.1%
R8 R14 R15: library part CMP-009-01062-3, "0603 (1608 Metric) 1/10 W 10R 1 Precision Thick Film Chip Resistor", Case-EIA=0603, Power=100mW, Tolerance=0.1%
R9 RAC RSR: library part CMP-009-00005-5, "Chip Resistor, 0 Ohm, 0.1 W, -55 to 155 degC, 0402 (1005 Metric)", Case/Package=0402, Max Operating Temperature=155°C, Min Operating Temperature=-55°C, Power=100mW, Tolerance=5%, Voltage Rating=50V, Mounting Technology=SM, Pins=2, RoHS Compliant=True
R10: library part CMP-0103-0511-5, "0603 (1608 Metric) 1/10 W 1R 5 Thick Film Chip Resistor", Case-EIA=0603, Case-Metric=1608, Power=100mW, Temp. Coefficent=±500, Tolerance=5%, Technology=SMT
R11: library part CMP-009-01410-5, "0603 (1608 Metric) 1/10 W 300K 1 Precision Thick Film Chip Resistor", Case-EIA=0603, Power=100mW, Tolerance=0.1%
R12: library part CMP-009-01140-3, "0603 (1608 Metric) 1/10 W 200K 1 Precision Thick Film Chip Resistor", Case-EIA=0603, Power=100mW, Tolerance=0.1%
R13: library part CMP-009-01412-5, "0603 (1608 Metric) 1/10 W 30K 1 Precision Thick Film Chip Resistor", Case-EIA=0603, Power=100mW, Tolerance=0.1%
R16: library part CMP-009-01079-3, "0603 (1608 Metric) 1/10 W 130K 1 Precision Thick Film Chip Resistor", Case-EIA=0603, Power=100mW, Tolerance=0.1%
U1: library part CMP-0069-00269-3, "SIMPLE SWITCHER® Power Converter 150 KHz 3A Step-Down Voltage Regulator, 5-pin TO-263, Pb-Free", Manufacturer="Texas Instruments", PackageTopMarking="NSUZXYTTE#*LM2596S*-5.0 P+", PowerWise=N, Code_JEDEC=MO-169-AB, ComponentLink1Description="Datasheet URL", ComponentLink1URL=http://www.ti.com/general/docs/lit/getliterature.tsp?genericPartNumber=LM2596&fileType=pdf, CompType=Switcher, PackageDescription="TO-263, Molded, .400 x .390 x .180in, 5 Lead, .067in Pitch, Surface Mount", PackageReference=KTT0005B, PinCount=5, RoHS=Y
USB_C_Plug: library part CMP-245163-000002-1, "CONN USB 2.0 TYPE-C R/A SMT", Current Rating=3/4.25/1.25/0.25A, Manufacturer=GCT, Package=0, Temperature="-40°C to +85°C", Temperature Range High=+85°C, Temperature Range Low=-40°C, Voltage Rating=20V, Automotive=No, Category=Conn, ComponentLink2Description=Datasheet, ComponentLink2URL=https://gct.co/files/drawings/usb4110.pdf, Conn Orientation="Right Angle", Contact Material=Gold,Nickel, Device Class L1=Connectors, Device Class L2="USB Connectors", Device Class L3=unset, Digikey Description="CONN USB 2.0 TYPE-C R/A SMT", Height=3.46mm, Is Female=yes, Lead Free=Yes, Manufacturer Part Number=USB4110-GF-A, Number of Contacts=16, Octopart=https://octopart.com/usb4110-gf-a-gct-103941985, RoHS=TRUE, Shielding=true, Standoff Height=0.1mm, Usb Standard="USB 2.0"

## Via types
v1: diameter 50, hole 28, Top Layer to Bottom Layer, 82 vias
v2: diameter 11.81, hole 7.87, Top Layer to Bottom Layer, 28 vias
v3: diameter 15.75, hole 13.78, Top Layer to Bottom Layer, 12 vias
v4: diameter 23.62, hole 11.81, Top Layer to Bottom Layer, 9 vias

## Nets (pads, with @x,y where several pads share a name; then routed paths per layer and width w, separated by ;. In a path a pad name is that pad's centre, name@x,y a point inside that pad or via, vN(x,y) a via of type N, cw(c..) or ccw(c..) an arc to the next point about the centre after c; other vN are vias at no path point)
+D_PWM_FWD: Ard.23 NFET+.1 | length 4945.4
  Top Layer w10: v1(1140,2240) 1364.47,2240 NFET+.1 ; v2(1690,3780) 1954.65,4044.65 1969.65,4044.65 v2(1970,4045) ; v1(2265,3855) 2265,3714.65 2390.59,3589.07 2434.65,3545 2450,3545 2580,3415 v1(2585,3415)
  Bottom Layer w10: v1(1140,2240) 1070,2310 1070,3140 1050,3160 1050,3750 1065,3765 1065,4115 1290,4340 1410,4340 1415,4345 1775,4345 1845,4275 1845,4170 v2(1970,4045) ; v2(1690,3780) 1715,3755 2165,3755 v1(2265,3855)
+D_PWM_REV: Ard.24 NFET-.1 | length 1327.8
  Top Layer w10: Ard.24@2290.59,3589.07 2290.59,3520.86 2296.44,3515 2420,3515 2495,3440 2495,3390.86 2485,3380.86 v1(2485,3311.25) ; v1(2985,3225) 3081.86,3128.14 3232.95,3128.14 3259.45,3101.65 NFET-.1
  Bottom Layer w10: v1(2485,3311.25) 2571.25,3225 v1(2985,3225)
ACN: C4.2 Charge_IC.2 R6.1 | length 488.8
  Top Layer w4: 2331.67,2927.97 2367.03,2927.97 2370,2925 2455,2925 v1(2577.5,2802.5)
  Top Layer w10: v1(2577.5,2802.5) 2578.96,2801.04 2708.38,2801.04 R6.1 2710.54,2800.28 2766.05,2800.28 C4.2
ACP: C3.2 Charge_IC.3 R5.1 | length 672.9
  Top Layer w4: 2331.67,2943.72 2351.28,2943.72 2360,2935 2470,2935 2525,2880 v1(2580,2880)
  Top Layer w10: v1(2580,2880) 2587.65,2887.65 2614.22,2887.65 2671.67,2945.1 C3.2 2675.59,2945.1 2725.7,2895 2875.6,2895 2913.04,2857.56 R5.1
ARD_V: Ard.2 RGPIOPU2.1 RGPIOPU.1 RI2CPU2.1 RI2CPU.1 | length 1453.4
  Top Layer w10: RI2CPU.1 2373.72,4407.59 2411.14,4445 2435,4445 2457.56,4422.44 RI2CPU2.1 2560,4385 2680,4505 2820,4505 2835,4490 2835,4474.4 2830.56,4469.96 2830.56,4448 RGPIOPU2.1 ; Ard.2@2990.59,4239.07 2970.59,4259.07 2970.59,4290.01 2822.56,4438.04 RGPIOPU2.1 ; RGPIOPU.1 3323.08,4473.57 3289.51,4440 RGPIOPU2.1
BAT+: Ard.15 Bat_AR.1 C15.2 CIN2.2 CIN.2 H-IC1.8 PBC.1 R14.1 RSR.2 U1.1 | length 8313.1
  Top Layer w10: CIN.2 1106.19,3258.32 1156.64,3258.32 CIN2.2 1165,3249.96 1165,3214.21 ; RSR.2 1189.66,4624.36 1269.02,4545 C15.2 1490.66,4545 ; v1(1130,3650) 1065,3585 1065,3230 1080.79,3214.21 1165,3214.21 ; v2(1300,2695) 1295,2700 1295,3214.21 ; R14.1 1295,3214.21 ; PBC.1 1490.66,4545 ; v1(1505,3470) 1511.5,3476.5 H-IC1.8 ; Ard.15@1690.59,4239.07 1633.52,4239.07 1467.59,4405 1430,4405 1424.14,4410.86 1424.14,4453.41 1490.66,4519.92 ; Bat_AR.1 1969.67,4820 1820,4820 1775,4775 1775,4540 1754.92,4519.92 1490.66,4519.92 ; v2(2430,1440) 2626.19,1243.81 2759.12,1243.81 2774.79,1228.14 U1.1 ; 1165,3214.21 1295,3214.21 ; 1490.66,4519.92 1490.66,4545
  Bottom Layer w10: v2(1300,2695) 1560,2435 1560,1150.86 1565.86,1145 2340,1145 2385.86,1099.14 2394.14,1099.14 2430,1135 v2(2430,1440) ; v1(1505,3470) 1310,3470 v1(1130,3650) 1125,3655 1125,3984.14 1130.86,3990 1465.93,3990 Ard.15@1689.99,4214.07
BAT-: 5.1KRPD2.2 5.1KRPD.2 60uF.1 Ard.14 Ard.19 Bat_AR.2 C1.1 C2.1 C3.1 C4.1 C5.1 C6.1 C12.1 C13.1 C14.1 C16.1 C17.1 C18.1 C19.1 C20.1 C21.1 C22.1 C23.1 Charge_IC.14 Charge_IC.27 CIN2.1 CIN.1 COUT.1 D1.2 H-IC1.1 H-IC1.6 N2.2 N3.2 PBC.2 PD.1 PDR.1 R12.1 R13.1 R16.1 U1.5 USB_C_Plug.A1-B12 USB_C_Plug.B1-A12 | length 5563.6
  Top Layer w4: v1(2185,3135) 2225,3095 2225,3034.1 ; v1(2190,2740) 2190,2840 2224.29,2874.29
  Top Layer w10: v1(1080,4450) 1090.82,4450 1107.11,4466.28 C14.1 ; CIN.1 1107.15,3321.11 1155.68,3321.11 CIN2.1 1199.14,3325.43 1208.84,3315.73 1208.84,3296.98 1230.64,3275.18 v1(1230.64,3264.36) ; v1(1160,2430) 1177.49,2447.49 PD.1 ; R12.1 1166.28,3436.28 1218.72,3436.28 v1(1220,3435) ; v2(1225,1605) 1225,1720 N3.2 ; C20.1 1229.69,3693.86 1214.76,3708.78 1214.76,3711.67 1195,3731.43 1195,3860 1242.1,3907.1 C16.1 1315.03,3907.1 1327.84,3919.91 C17.1 1244.32,4074.32 v1(1235,4065) ; USB_C_Plug.B1-A12 1411.1,2788.39 1488.9,2788.39 C21.1 ; USB_C_Plug.A1-B12 1410.63,3042.09 C22.1@1494.37,3042.09 ; C19.1 1504.14,3584.06 1558.2,3530 v1(1620,3530) ; v1(1480,2740) 1480.43,2740.43 1657.8,2740.43 5.1KRPD2.2 ; v1@1485,2745 1485,2782.44 C21.1@1489.84,2787.28 ; v1(1485,3095) 1485,3051.73 1494.02,3042.72 C22.1 1497.28,3045 1571.25,3045 1575.29,3049.03 5.1KRPD.2 ; PBC.2 1569.4,4604.69 1584.08,4590 v1(1685,4590) ; N2.2 1880,1770 v2(1885,1765) ; Ard.14@1790.59,4239.07 1795,4234.65 v1(1795,4070) ; H-IC1.1 1865.64,3275.97 1865.64,3231.52 v3(1866.16,3230.99) ; v1(1900,4565) 1900,4716.44 1914.69,4731.13 Bat_AR.2 ; H-IC1.6 1965.11,3492.94 1973.83,3501.65 1973.83,3503.83 v3(1990,3520) ; 60uF.1 2019.27,2175 v2(2060,2175) ; v1(2605,3495) 2606.22,3493.78 2668.78,3493.78 R13.1 ; C12.1 2618.62,3184.67 2664.67,3184.67 v3(2665,3185) ; C5.1 2622.45,2257.1 2554.55,2325 2554.55,2360.45 v1(2550,2365) 2612.29,2427.29 C1.1 2648.96,2428.28 2659.55,2438.87 2659.55,2442.89 2690.41,2473.75 2718.82,2473.75 C6.1 ; C3.1 2675.59,2889.98 2725.41,2840.17 v3(2810.17,2840.17) 2810.17,2785.86 2804.31,2780 2802.85,2780 2768.71,2745.85 C4.1 ; C18.1 2828.09,2060.34 2855.02,2087.27 v1(2857.72,2087.27) 2866.79,2087.27 2977.56,2198.04 C2.1 2981.34,2196.22 3051.22,2196.22 C23.1 ; Ard.19@2790.59,3589.07 2790.59,3514.41 v1(2820,3485) ; C13.1 R16.1 2987.85,3121.32 3004.18,3105 v1(3015,3105) ; U1.5 3321.15,1163.28 3355.95,1198.07 D1.2 3433.51,1198.07 3480.95,1245.51 COUT.1 3483.96,1244.47 3483.96,1046.04 v1(3485,1045) ; v2(3055,3345) 3055.35,3344.65 3057.13,3344.65 3141.05,3260.73 PDR.1
BATDRV: Charge_IC.21 Q5.1 | length 1246.1
  Top Layer w4: v1(1740,2890) 1875,2890 1944.47,2959.47 2162.57,2959.47
  Top Layer w10: v1(1655,2325) 1665.82,2325 1687.48,2303.35 Q5.1 ; v1(1728.19,2730) 1725,2733.19 1725,2780 1740,2795 v1(1740,2890)
  Bottom Layer w10: v1(1655,2325) 1725,2395 1725,2726.81 v1(1728.19,2730)
BTST1: C7.1 Charge_IC.30 | length 402.7
  Top Layer w4: Charge_IC.30@2271.58,2885.82 2271.58,2868.42 2355,2785 v1(2355,2675)
  Top Layer w10: v1(2355,2675) 2395.19,2675 2467.22,2602.97 2469.18,2602.97 2477.18,2594.97 C7.1
BTST2: C8.1 Charge_IC.25 | length 226.2
  Top Layer w4: v1(2110,2865) 2145,2865 2168.6,2888.6 Charge_IC.25@2191.4,2888.6
  Top Layer w10: C8.1 2037.56,2788.79 2070,2821.24 2070,2825 v1(2110,2865)
CBATR: Charge_IC.18 R11.1 R12.2 | length 1271.4
  Top Layer w4: v1(1770,3080) 1843.29,3006.71 2162.57,3006.71
  Top Layer w10: R11.1 1107.8,3429.55 1156.32,3381.03 1158.28,3381.03 1213.97,3381.03 v1(1280,3315)
  Bottom Layer w10: v1(1280,3315) 1407.5,3315 1642.5,3080 v1(1770,3080)
CC1: 5.1KRPD.1 USB_C_Plug.A5 | length 264.5
  Top Layer w10: USB_C_Plug.A5 1634.14,2964.68 1634.14,2971.79 1656.27,2993.91 5.1KRPD.1
CC2: 5.1KRPD2.1 USB_C_Plug.B5 | length 300.1
  Top Layer w10: USB_C_Plug.B5 1473.42,2846.57 1481.84,2855 1640,2855 1658.23,2836.77 5.1KRPD2.1
CHRG_OK: Ard.20 Charge_IC.4 RGPIOPU.2 | length 2527.5
  Top Layer w4: 2333.46,2960 2355,2960 2375,2940 2466.28,2940 2476.28,2950 v1@2580,2950
  Top Layer w10: v1(2580.02,2949.91) 2580.02,2949.98 2700,3070 2700,3375 2739.71,3414.71 2739.71,3479.71 2755,3495 2755,3524.65 Ard.20@2690.59,3589.07 ; RGPIOPU.2 3327,4418.45 3335,4410.45 3335,4408.49 3385,4358.5 v1(3385,4295)
  Bottom Layer w10: Ard.20@2690,3615 2690,3895 2795,4000 3424.14,4000 3430,4005.86 3430,4250 v1(3385,4295) v1@3380,4300
CMPOUT: Ard.22 Charge_IC.15 RGPIOPU2.2 | length 1999.9
  Top Layer w10: Charge_IC.15 2208.59,3066.41 2200,3075 2120.86,3075 2040,3155.86 v1(2040,3160) 2150,3160 2215,3225 2245,3225 v1(2325,3305) v1@2325,3302.5 ; Ard.22@2490.59,3589.07 2490.59,3674.14 2496.44,3680 2630,3680 2630,4025 2740,4135 2740,4410.6 2767.44,4438.04 RGPIOPU2.2
  Bottom Layer w10: v1(2325,3305) 2325,3345 2490,3510 2490,3565 Ard.22@2490,3615
COMP1: C16.2 Charge_IC.16 R17.1 | length 1372.8
  Top Layer w4: v1(1927.36,3122.18) 2004.54,3045 Charge_IC.16@2190.9,3045
  Top Layer w10: C16.2 1315.03,3851.98 1422.01,3745 v1(1425,3745) 1441.89,3761.89 R17.1
  Bottom Layer w10: v1(1425,3745) 1425,3624.54 1926.61,3122.93 v1@1928.9,3122.93
COMP2: C19.2 Charge_IC.17 R18.1 | length 1156.4
  Top Layer w4: v1(1840,3125) 1942.35,3022.65 2179.82,3022.65 2180.84,3023.67
  Top Layer w10: R18.1 1392.44,3417.44 v1(1395,3420) 1395,3482.05 1431.93,3518.98 1431.93,3520.94 1439.93,3528.94 C19.2
  Bottom Layer w10: v1(1395,3420) 1545,3420 v1(1840,3125)
DRIVE+: H-IC1.5 P3.1 | length 1502.3
  Top Layer w10: H-IC1.5 2015.11,3542.38 2050.59,3577.86 2050.59,3755.59 2230,3935 2230,4107.5 2245,4122.5 2245,4396.72 2258.74,4410.46 2258.74,4444.33 2432.56,4618.15 2510.94,4618.15 2525.63,4632.83 P3.1
DRIVE-: H-IC1.7 P3.2 | length 1999.2
  Top Layer w10: H-IC1.7 1915.11,3542.38 1950,3577.27 1950,3775 2150,3975 2150,4330 2230,4410 2230,4520 2280,4570 2280,4835 2360,4915 2499.37,4915 2604.37,4810 P3.2
ENOTG: Ard.25 Charge_IC.5 | length 927.9
  Top Layer w4: Charge_IC.5 2445.21,2975.21 v1(2460,2990)
  Top Layer w10: v1(2135,3345) 2190.59,3400.59 Ard.25@2190.59,3589.07
  Bottom Layer w10: v1(2135,3345) 2135,3270 2300,3105 2300,3095.86 2305.86,3090 2345,3090 2399.79,3035.21 2414.79,3035.21 v1(2460,2990)
HIDRV1: Charge_IC.31 N1.1 | length 2086
  Top Layer w4: v2(2200,2410) 2265,2475 v1(2330,2475) ; 2287.33,2902.01 Charge_IC.31 2287.33,2862.67 2295,2855 2350,2855 2385.6,2819.4 2385.6,2799.4 v1(2430,2755)
  Top Layer w10: v2(1995,1835) 2040,1790 v2(2040,1650) ; N1.1 2095.55,1453.47 2194.65,1552.57 2194.65,1554.65 v2(2195,1555) ; v2(2165,1960) 2160,1960 2105,2015 2105,2150 v2(2270,2315)
  Bottom Layer w10: v2(1995,1835) 2040,1835 v2(2165,1960) ; v2(2040,1650) 2100,1650 v2(2195,1555) ; v2(2200,2410) 2200,2385 v2(2270,2315) ; v1(2330,2475) 2435,2580 2435,2750 v1(2430,2755)
HIDRV2: Charge_IC.24 N4.1 | length 1185.8
  Top Layer w4: v1(1925,2750) 2087.22,2912.22 2162.57,2912.22
  Top Layer w10: v1(1925,2750) 2010,2665 v2(2010,2605) ; v2(2390,2155) 2409.09,2135.91 N4.1
  Bottom Layer w10: v2(2010,2605) 2010,2535 v2(2390,2155)
IADPT: C13.2 Charge_IC.8 R16.2 | length 674.2
  Top Layer w4: Charge_IC.8 2384.69,3080.44 v1(2549.91,3080.44)
  Top Layer w10: v1(2775,3145) 2775,3155 2796.44,3176.44 C13.2 R16.2
  Bottom Layer w10: v1(2549.91,3080.44) 2614.46,3145 v1(2775,3145)
IBAT: C12.2 Charge_IC.9 | length 396.9
  Top Layer w4: 2302.33,3051.83 2302.33,3057.33 2345,3100 2455,3100 v1(2485,3130)
  Top Layer w10: v1(2485,3130) 2492.65,3137.65 2514.53,3137.65 2616.32,3239.45 C12.2
LODRV1: Charge_IC.29 N2.1 | length 2220.5
  Top Layer w4: 2255.83,2881.55 2255.83,2869.17 2335,2790 ; v1(2295,2740) 2335,2780 2335,2788.7
  Top Layer w10: N2.1 1619.45,1604.45 v2(1645,1630)
  Bottom Layer w10: v2(1645,1630) 1928.55,1630 2452.05,2153.49 2452.05,2192.95 2096.87,2548.13 2096.87,2652.49 2100.84,2656.46 2106.46,2656.46 2140,2690 2245,2690 v1(2295,2740)
LODRV2: Charge_IC.26 N3.1 | length 1287.6
  Top Layer w4: v1(2100,2750) 2135,2785 2135,2800 2208.59,2873.59 2208.59,2884.25
  Top Layer w10: N3.1 1615.91,2080.91 v1(1630,2095)
  Bottom Layer w10: v1(1630,2095) 1795,2260 1795,2379.14 1800.86,2385 1875,2385 1955,2465 1955,2605 v1(2100,2750)
NetC1_2: C1.2 R4.1 | length 128
  Top Layer w10: C1.2 2756.36,2427.29 2794.62,2389.03 R4.1
NetC6_2: C6.2 N1.3 R6.2 R7.1 RAC.2 | length 2185.8
  Top Layer w10: N1.3 1914.45,1453.47 1940.94,1479.96 2037.84,1479.96 2262.88,1705 2445,1705 2470.34,1730.34 2492.77,1730.34 2545,1782.57 2545,2020 2605,2080 2605,2117.25 2595,2127.25 v2(2595,2165) ; R6.2 2711.8,2744.46 2733.78,2722.49 2733.78,2706.93 RAC.2@2739.87,2700.85 ; RAC.2 RAC.2@2739.87,2700.85 ; v2(2805,2545) 2795.82,2554.18 C6.2 2675.82,2554.18 2600,2630 2600,2699.14 2605.86,2705 2642.56,2705 R7.1 2646.71,2700.85 RAC.2@2739.87,2700.85
  Bottom Layer w10: v2(2595,2165) 2595,2200 2805,2410 v2(2805,2545)
NetC14_2: C14.2 C15.1 Q5.3 R15.1 RSR.1 | length 3458.9
  Top Layer w10: RSR.1 1128.83,4577.19 1128.83,4571.15 1198.26,4501.72 C14.2 1200.23,4501.72 1208.08,4509.57 C15.1 1270,4190 1070,3990 1070,3618.36 1045,3593.36 1045,2745 1155,2635 1599.63,2635 1688.19,2723.56 1688.19,2746.57 1695,2753.38 v2(1695,2785) 1695,2819.98 1697.46,2822.45 1697.46,2856.94 1671.96,2882.44 R15.1 ; v1(1870,2480) 1875.75,2474.25 Q5.3
  Bottom Layer w10: v2(1695,2785) 1769.51,2785 ; v2(1775,2780) 1870,2685 v1(1870,2480)
NetC17_2: C17.2 R17.2 | length 213.7
  Top Layer w10: C17.2 1392.94,3931 1431.93,3892.01 1431.93,3890.05 1439.93,3882.05 R17.2
NetC20_2: C20.2 R18.2 | length 232.2
  Top Layer w10: C20.2 1300.55,3693.86 1320,3674.41 R18.2
NetCharge_IC_6: Charge_IC.6 R9.1 R10.2 | length 686.4
  Top Layer w4: 2342.45,2991.15 2391.68,2991.15 2429.36,3028.83 2430.54,3030 2543,3030 v1(2565,3008)
  Top Layer w10: v1(2775,2940) 2860,2940 2877.44,2957.44 R10.2 2918.94,2961.38 2961.06,2961.38 R9.1
  Bottom Layer w10: v1(2565,3008) 2707,3008 v1(2775,2940)
NetCharge_IC_19: Charge_IC.19 R14.2 | length 988.6
  Top Layer w4: v1(1525,3290) 1525,3225.29 1770.29,2980 1825,2980 1835.96,2990.96 2162.57,2990.96
  Top Layer w10: R14.2 1493.5,3269.33 1514.18,3290 v1(1525,3290)
NetCharge_IC_20: Charge_IC.20 R15.2 | length 520.5
  Top Layer w4: v1(1830,2925) 1880.21,2975.21 2162.57,2975.21
  Top Layer w10: R15.2@1668.04,2937.56 R15.2 1677.56,2930 1825,2930 v1(1830,2925)
NetD1_1: D1.1 L1.1 U1.2 | length 911.8
  Top Layer w10: U1.2 2841.72,1061.72 2839.14,1059.14 2839.14,1050.86 2850,1040 v1@2850,1030 ; v1@3295,1350 v1(3295,1349.58) 3355.95,1288.63 D1.1 3357.91,1384.57 L1.1
  Bottom Layer w10: v1(2844.57,1045.43) 3148.72,1349.58 v1(3295,1349.58)
NetH-IC1_2: H-IC1.2 NFET+.3 PU.1 | length 2053.4
  Top Layer w10: v2(1465,2250) 1485.86,2229.14 NFET+.3 ; v2(1854.22,3055) 1853.43,3055 1800,3108.43 1800,3115 1787.87,3127.13 1708.73,3127.13 1695,3140.86 1695,3210.65 1723.8,3239.45 PU.1 1727.72,3239.45 1787.17,3180 1895,3180 1915.11,3200.11 H-IC1.2
  Bottom Layer w10: v2(1465,2250) 1465,2420 1275,2610 1275,2844.14 1290.86,2860 1300,2860 1485,3045 1659.36,3045 1664.36,3040 1839.22,3040 v2(1854.22,3055)
NetH-IC1_3: H-IC1.3 NFET-.3 PUR.1 | length 5811.4
  Top Layer w10: v2(1745,3520) 1735,3530 1735,3680 2035,3980 2035,4120 2040,4125 2040,4335 2200,4495 2200,4660 2235,4695 2235,4959.14 2240.86,4965 2935,4965 3430,4470 3430,4425 3460,4395 3460,4275 3350,4165 3350,3545 3320,3515 3140,3515 2974.14,3349.14 2974.14,3340.86 3130,3185 3175,3185 3185,3175 3330,3175 3376.86,3128.14 3414.05,3128.14 3440.55,3101.65 NFET-.3 ; H-IC1.3 1965.11,3224.89 1970,3220 2085.48,3220 PUR.1@2118.04,3252.56 ; v2(2065,3320) 2065,3305.6 PUR.1@2118.04,3252.56 ; PUR.1 PUR.1@2118.04,3252.56
  Bottom Layer w10: v2(1745,3520) 1865,3400 1865,3395 1940,3320 v2(2065,3320)
NetNFET+_2: NFET+.2 PD.2 | length 222.3
  Top Layer w10: PD.2 1448.32,2502.61 NFET+.2
NetNFET-_2: NFET-.2 PDR.2 | length 212.9
  Top Layer w10: PDR.2 3335.85,3315.85 NFET-.2
NetU1_3: U1.3 U1.6 | length 415.4
  Top Layer w10: U1.3 U1.6
PROCHOT: Ard.26 Charge_IC.11 | length 696.3
  Top Layer w10: Charge_IC.11 2271.58,3076.58 v1(2335,3140)
  Bottom Layer w10: Ard.26@2090,3615 2090,3565 2270,3385 2270,3205 v1(2335,3140)
PSYS: Charge_IC.10 R13.2 | length 585.1
  Top Layer w4: 2287.33,3061.83 2287.33,3067.33 2330,3110 2360,3110 2425,3175 2480,3175 v1(2615,3310)
  Top Layer w10: v1(2615,3310) 2615,3382.44 2660.04,3427.48 2660.04,3429.44 2668.04,3437.44 R13.2
REGN: C2.2 C5.2 C18.2 C21.2 C22.2 C23.2 Charge_IC.1 Charge_IC.28 PU.2 PUR.2 R4.2 R5.2 R7.2 R8.1 RAC.1 USB_C_Plug.A4-B9 USB_C_Plug.B4-A9 | length 5551.3
  Top Layer w4: PU.2@1735,3175.09 1745.09,3165 1902.03,3165 1942.03,3205 2072.49,3205 2082.49,3195 PUR.2@2118.18,3195 ; v1(2240,2825) 2240,2855 ; 2240.08,2855.08 Charge_IC.28 ; Charge_IC.1 2435,2912.22 2485,2862.22 v1(2485,2825)
  Top Layer w10: USB_C_Plug.B4-A9 1410.87,2821.85 1489.13,2821.85 C21.2 1521.46,2822.72 1534.18,2810 v1(1545,2810) ; USB_C_Plug.A4-B9 1411.34,3008.62 1493.66,3008.62 C22.2 1496.14,3006.14 1553.86,3006.14 v1(1555,3005) ; PU.2 1727,3184.33 1735,3176.33 1735,3175.09 v3(1735,3150) ; R7.2 2729.25,2647.44 RAC.1 2791.34,2610 v1(2800,2610) ; C5.2 2759.86,2255.14 v1(2770,2245) ; C18.2 2708.91,2183.91 v1(2770,2245) ; C23.2 2968.04,2247.56 2922.44,2201.96 C2.2 2815,2200 v1(2770,2245) ; R8.1 3051.82,2931.78 3046.3,2931.78 2916.96,2802.44 R5.2 2913.04,2802.44 2905.04,2794.44 2905.04,2792.48 2800,2687.44 v1(2800,2610) ; v1(3265,1855) v1@3280,1855 ; v1(2770,2245) 2849.74,2324.74 R4.2 2849.74,2560.26 v1(2800,2610)
  Bottom Layer w4: v3(1735,3150) 1737.25,3152.25 1745,3152.25 1746.87,3154.13 1750.87,3154.13 1820,3085 1900,3085 1920,3065 1920,3060 v3(1890,3030)
  Bottom Layer w10: v3(1890,3030) 1890,2995.86 1879.14,2985 1822.5,2985 1797.5,2960 1665,2960 1659.14,2954.14 1650.86,2954.14 1600,3005 v1(1555,3005) 1550,3000 1550,2815 v1(1545,2810) 2214.18,2810 2229.18,2825 v1(2240,2825) v1(2485,2825) 2700,2610 v1(2800,2610) ; v1(2770,2245) 3160,1855 v1(3265,1855)
SCL: Ard.9 Charge_IC.13 RI2CPU.2 | length 1616.7
  Top Layer w4: 2239.94,3170.23 2240.08,3170.08 2240.08,3166.13 2238,3164.04 2238,3149.96 2240.08,3147.88 Charge_IC.13
  Top Layer w10: 2239.94,3170.23 2314.71,3245 v1(2360,3245) 2395,3280 2395,3400 v1(2345,3450) ; RI2CPU.2 2286.74,4241.74 2290,4238.48 v1(2290,4146.25)
  Bottom Layer w10: Ard.9@2289.99,4264.07 2289.99,4214.07 2290,4146.25 2335,4101.25 2335,3565 2345,3555 v1(2345,3450)
SDA: Ard.8 Charge_IC.12 RI2CPU2.2 | length 1624.7
  Top Layer w4: 2255,3033 2255,3157 2295.43,3157 2331.93,3193.5 2358.5,3193.5 2375,3210 v1@2410,3210
  Top Layer w10: Ard.8@2390.59,4239.07 2390.59,4371.18 2402.44,4383.04 RI2CPU2.2
  Bottom Layer w10: Ard.8@2389.99,4264.07 2389.99,4214.07 2392.5,4211.57 2392.5,4148.75 v1(2395,4146.25) 2395,3870.21 2545,3720.21 2545,3455 2410,3320 v1(2410,3211.25)
SW1: C7.2 Charge_IC.32 L2.1 N1.2 N2.3 | length 2840.5
  Top Layer w4: Charge_IC.32 2361.4,2888.6 v1(2505,2745)
  Top Layer w10: N2.3 1800.55,1486.53 1859.47,1427.61 1859.47,1315.53 N1.2 2118.11,1283.11 2173.11,1283.11 2685,1795 2685,1920 2650,1955 2650,2139.56 2508.11,2281.46 2450.71,2281.46 2431.5,2300.67 L2.1 2431.5,2359.33 2570,2497.83 2570,2595 ; v1(2505,2745) 2570,2680 2570,2595 ; C7.2 2568.01,2593.01 2570,2595
SW2: C8.2 Charge_IC.23 L2.2 N3.3 N4.3 | length 3827.7
  Top Layer w4: v1@1953.98,2838.98 1885,2770 1885,2670 2225,2330 2259.68,2330 2262.58,2332.91 2277.42,2332.91 2280.32,2330 L2.2 ; v1(1970,2855) 1970,2880 2017.97,2927.97 2162.57,2927.97
  Top Layer w10: N3.3 1235.36,2085 1130.86,2085 1125,2079.14 1125,1460 1160,1425 1390,1425 1550,1585 1550,1929.14 1555.86,1935 1810,1935 v2(1845,1970) ; C8.2 1982.44,2761.96 2049.65,2829.17 2049.65,2839.65 v2(2050,2840) ; v2(2150,2085) 2200.91,2135.91 N4.3 2318.5,2159.96 L2.2
  Bottom Layer w10: v2(1845,1970) 2035,1970 v2(2150,2085) ; v1(1970,2855) 2035,2855 v2(2050,2840)
VDDA: Charge_IC.7 R8.2 R9.2 R10.1 R11.2 | length 4038.1
  Top Layer w4: 2342.45,3006.52 2347.42,3006.52 2354.45,3013.55 2354.45,3018.71 2379.57,3043.83 2424.73,3044 2439.64,3044 2549.72,3043.44 ccw(c2549.91,3080.44) 2557.42,3044.22 cw(c2565,3008) 2564.16,3044.99 2616.17,3046.17 v1(2640,3070) ; v1@2653.09,3083.09 2685,3115 v3(2685,3395)
  Top Layer w10: R11.2 1105.84,3526.12 1097.84,3534.12 1097.84,3551.41 1088.74,3560.51 v3(1088.74,3562.06) 1127.06,3562.06 v3(1220,3655) ; v1(2850,3055) 2885.04,3019.96 2907.6,3019.96 R10.1 2918.94,3008.62 2961.06,3008.62 R9.2 3000.31,3004.69 3010,2995 3059.72,2995 R8.2 R8.2@3057.86,2994.9
  Bottom Layer w10: v3(1220,3655) 1220,3656.56 1234.71,3671.27 1234.71,3679.71 1447.5,3892.5 1997.5,3892.5 2225,4120 2225,4309.14 2230.86,4315 2495,4315 2505.86,4325.86 2514.14,4325.86 2540.51,4299.49 2540.51,4182.57 2622.72,4100.37 2622.72,3567.28 2690,3500 2704.14,3500 2710,3494.14 2710,3420 v3(2685,3395) ; v1(2640,3070) 2824.18,3070 2839.18,3055 v1(2850,3055)
VOUT: COUT.2 H-IC1.4 L1.2 U1.4 | length 3786.9
  Top Layer w4: v3@2150,2667.5 v3(2150,2660) 2150,2640 2060,2730 2060,2770 2095,2805 2110,2805 v3(2155,2850)
  Top Layer w10: H-IC1.4 2048.5,3276.5 v3(2060,3265) ; v1(2975,1045) 2975.58,1045.58 U1.4 ; v1(3480,1535) 3479.41,1534.41 L1.2 3482.91,1389.57 COUT.2
  Bottom Layer w10: v3(2060,3265) 2060,3211.72 2105.86,3165.86 2105,3165 2105,2945 2155,2895 v3(2155,2850) ; v3(2150,2660) 2150,2545 3160,1535 v1(3480,1535) 3480,1478.01 3046.99,1045 v1(2975,1045)
VSYS: 60uF.2 Charge_IC.22 N4.2 Q5.2 | length 1898.6
  Top Layer w4: v1(1875,2855) 1877,2853 1908,2853 1998.72,2943.72 2162.57,2943.72
  Top Layer w10: v1(1875,2855) 1875,2575.86 1880.86,2570 1935,2570 2000,2505 2000,2360 1943.35,2303.35 Q5.2 Q5.2@1913.55,2294.49 ; 60uF.2 1980.47,2227.56 Q5.2@1913.55,2294.49 ; N4.2 2155,1880 1913.55,2121.45 Q5.2@1913.55,2294.49
pads on no net: Ard.1 Ard.3 Ard.4 Ard.5 Ard.6 Ard.7 Ard.10 Ard.11 Ard.12 Ard.13 Ard.16 Ard.17 Ard.18 Ard.21 Ard.27 Ard.28 Ard.29 Ard.30 Bat_AR.MP1 Bat_AR.MP2 Charge_IC.33 H-IC1. P3.MP1 P3.MP2 PBC.MP1 PBC.MP2 USB_C_Plug. USB_C_Plug.1 USB_C_Plug.2 USB_C_Plug.3 USB_C_Plug.4 USB_C_Plug.A6 USB_C_Plug.A7 USB_C_Plug.A8 USB_C_Plug.B6 USB_C_Plug.B7 USB_C_Plug.B8
copper on no net: | length 13190
  Top Layer w10: 985,1000 3570,1000 3570,5010 985,5010 985,1000
  other v4: 2208.59,2927.97 2247.96,2927.97 2287.33,2927.97 2208.59,2967.34 2247.96,2967.34 2287.33,2967.34 2208.59,3006.71 2247.96,3006.71 2287.33,3006.71

## Polygon pours and split planes (outlines as drawn)
BAT- on Bottom Layer "BAT-_L02_P000" (solid, pour order 0): 995,4995 1000,4990 1000,1010 3575,1010 3575,4999.3